# EAGLE board Smart_Greenhouse (EAGLE 9.7.0)

Size 219.88 x 109.9 mm. Coordinates in mm from the lower left corner, seen from the top.
Outline: 0,0 219.88,0 219.88,109.9 0,109.9 0,0
Copper layers (1*16): Top 0.035mm / dielectric 1.5mm / Bottom 0.035mm
Design rules "default": minimum track width 6mil, minimum drill 0.35mm, track to track 6mil, track to pad 6mil, pad to pad 6mil, via to via 6mil, smd to smd 6mil, copper to edge 40mil, drill to drill 6mil, minimum pad ring 10mil, minimum via ring 8mil, stop-mask expansion 4mil, vias tented up to drill 0mil, thermal gap 10mil

## Footprints (pad centres in the part's own frame; a part is rotated, then mirrored left to right if it is on the bottom)
SENRD254W50D503H320B = drill 0.7 pad 1.3: 1 -1.27,0; 2 1.27,0
RESAD1016W63L850D250B = drill 0.83 pad 1.43: 1 -5.08,0; 2 5.08,0
HA-06-SM065 = drill 1 pad 1.676: 1 -2.54,-2.54; 2 0,2.54; 3 2.54,-2.54
SG90 = drill 1.016 long: 1 -2.54,0; 2 0,0; 3 2.54,0
TO92 = drill 0.813 octagon: 1 -1.27,0; 2 0,1.905; 3 1.27,0
JHD-162A = drill 1.016 long: 1 -19.05,0; 2 -16.51,0; 3 -13.97,0; 4 -11.43,0; 5 -8.89,0; 6 -6.35,0; 7 -3.81,0; 8 -1.27,0; 9 1.27,0; 10 3.81,0; 11 6.35,0; 12 8.89,0; 13 11.43,0; 14 13.97,0; 15 16.51,0; 16 19.05,0
ARDUINO-UNO-R3-SHIELD = drill 1.016 pad 1.88: 3.3V 24.13,-2.54; 5V 24.13,0; A0 24.13,12.7; A1 24.13,15.24; A2 24.13,17.78; A3 24.13,20.32; A4 24.13,22.86; A5 24.13,25.4; AREF -24.13,-13.97; D2 -24.13,20.32; D3 -24.13,17.78; D4 -24.13,15.24; D5 -24.13,12.7; D6 -24.13,10.16; D7 -24.13,7.62; D8 -24.13,3.81; D9 -24.13,1.27; D10 -24.13,-1.27; D11 -24.13,-3.81; D12 -24.13,-6.35; D13 -24.13,-8.89; GND@0 24.13,2.54; GND@1 24.13,5.08; GND@2 -24.13,-11.43; IOREF 24.13,-7.62; NC 24.13,-10.16; RES 24.13,-5.08; RX -24.13,25.4; SCL -24.13,-19.05; SDA -24.13,-16.51; TX -24.13,22.86; VIN 24.13,7.62

## Placement (x,y rotation side)
Q1  PHOTOTRANSISTOR  [SENRD254W50D503H320B]  127.04,28.2 180 top
R1  1k  [RESAD1016W63L850D250B]  133.39,25.66 180 top
R2  220  [RESAD1016W63L850D250B]  176.57,35.82 0 top
RPOT1  250k  [HA-06-SM065]  118.15,38.36 0 top
SERVO1  SERVOSG90  [SG90]  212.82,15.98 180 top
U1  TMP36GT9Z_TO92  [TO92]  148.63,28.2 0 top
U2  LCD-16X2JHD-162A  [JHD-162A]  139.9,102.35 0 top
U3  ARDUINO-UNO-R3-SHIELD  [ARDUINO-UNO-R3-SHIELD]  47.88,29.84 270 top

## Library data of the parts
Q1 R1 R2 RPOT1 SERVO1 U1-U3 = Tinkercad

## Nets
U2_LED+: R2.2 U2.15
U2_VO: RPOT1.2 U2.3
U3_5V: Q1.2 R2.1 RPOT1.1 SERVO1.2 U2.2 U3.5V
U3_A0: Q1.1 R1.2 U3.A0
U3_A1: U1.2 U3.A1
U3_D2: U2.4 U3.D2
U3_D3: U2.6 U3.D3
U3_D4: U2.11 U3.D4
U3_D5: U2.12 U3.D5
U3_D6: U2.13 U3.D6
U3_D7: U2.14 U3.D7
U3_D8: SERVO1.3 U3.D8
U3_GND: R1.1 RPOT1.3 SERVO1.1 U1.1 U1.3 U2.1 U2.5 U2.16 U3.GND@0 U3.GND@1 U3.GND@2

## Tracks (layer width: path | path; a pad name or v marks a point on that pad's centre or on a via)
U2_LED+  (1 unrouted)
U2_VO  (1 unrouted)
U3_5V  (5 unrouted)
U3_A0  (2 unrouted)
U3_A1  (1 unrouted)
U3_D2  (1 unrouted)
U3_D3  (1 unrouted)
U3_D4  (1 unrouted)
U3_D5  (1 unrouted)
U3_D6  (1 unrouted)
U3_D7  (1 unrouted)
U3_D8  (1 unrouted)
U3_GND  (10 unrouted)